# Altium PCB PCB1 (Luggi-PCs in Konflikt stehende Kopie 2014-06-04).PcbDoc
Units mm, origin at the board's own origin, x right, y up, seen from the top; angles counter-clockwise.
Board outline 100 x 160 mm, 2 copper layers (Top Layer, Bottom Layer); 53 components, 59 nets, 306 pads, 40 vias.
Unrouted connection lines stored in the file: 1.
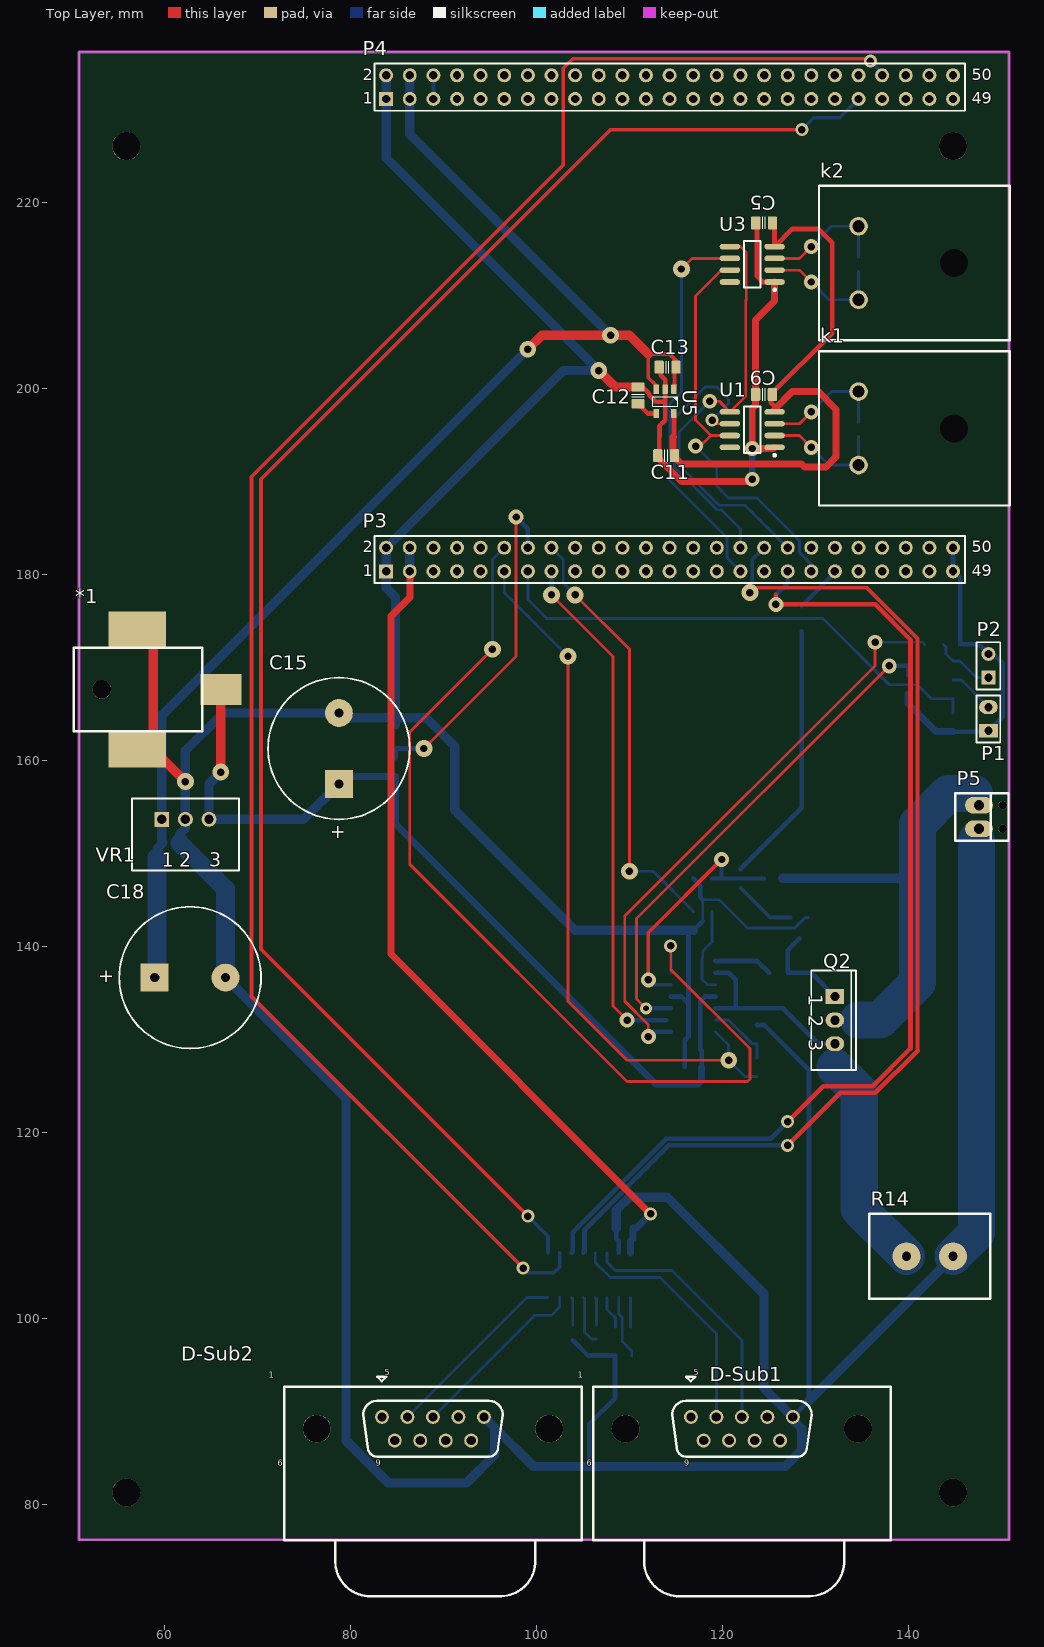
[diagram p0: Top Layer view]
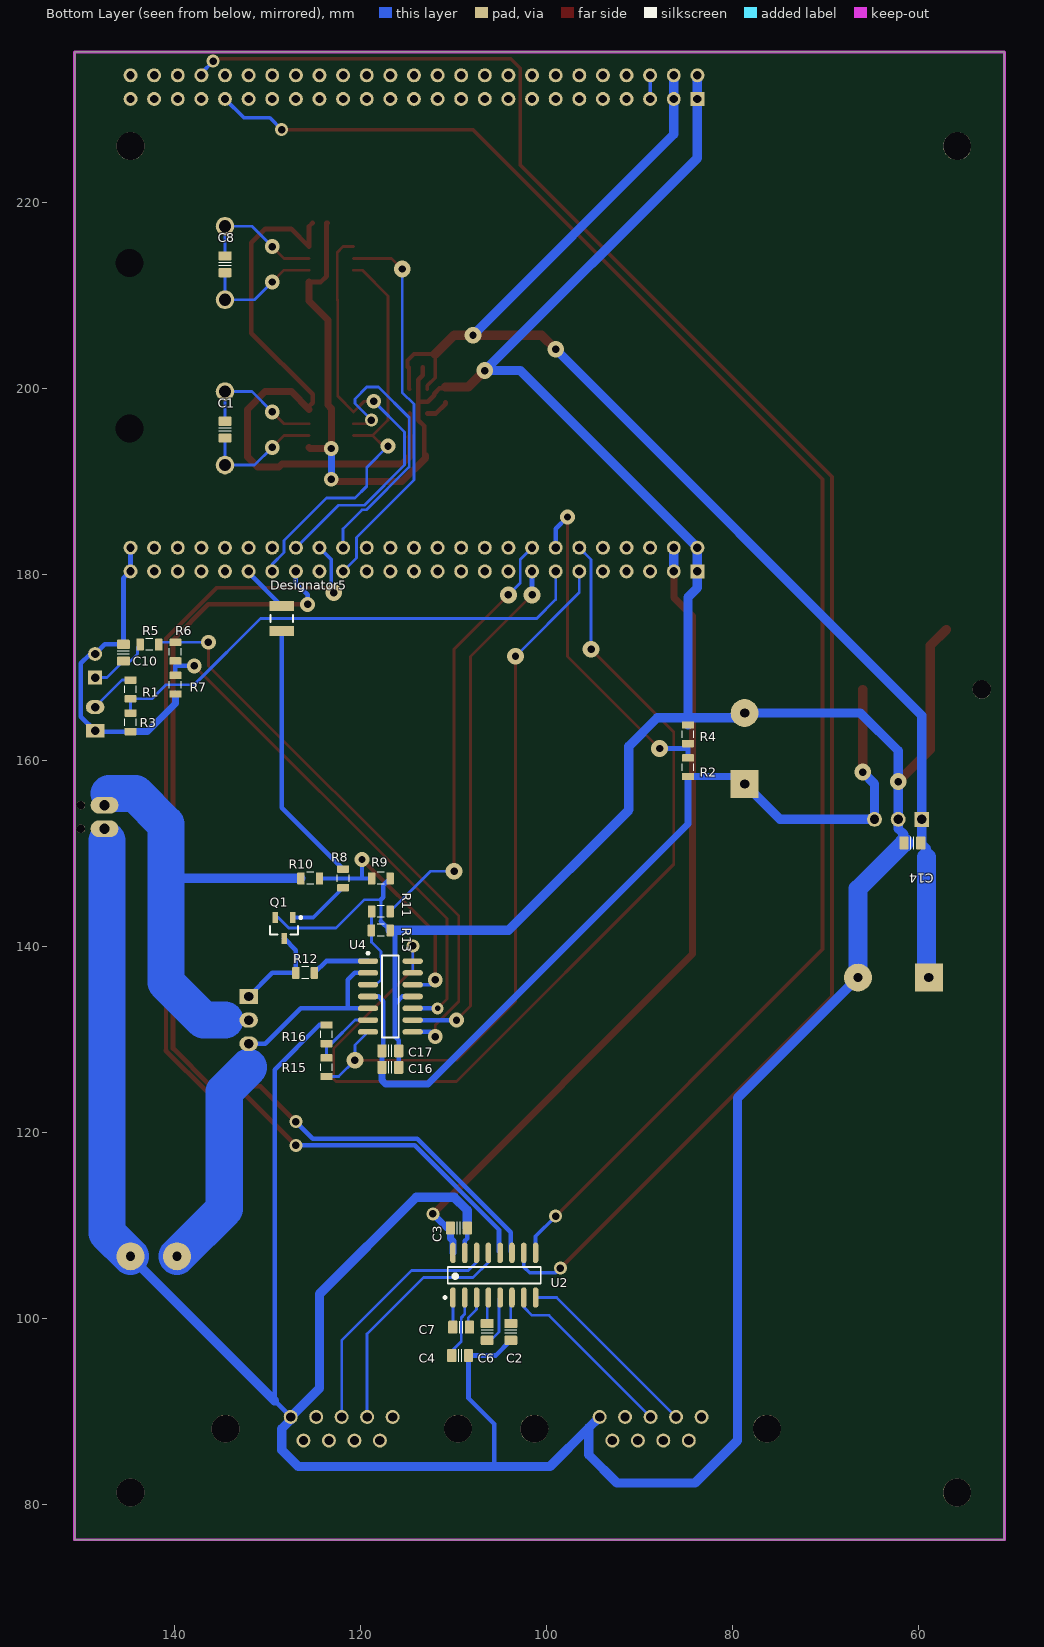
[diagram p1: Bottom Layer view, seen from below]
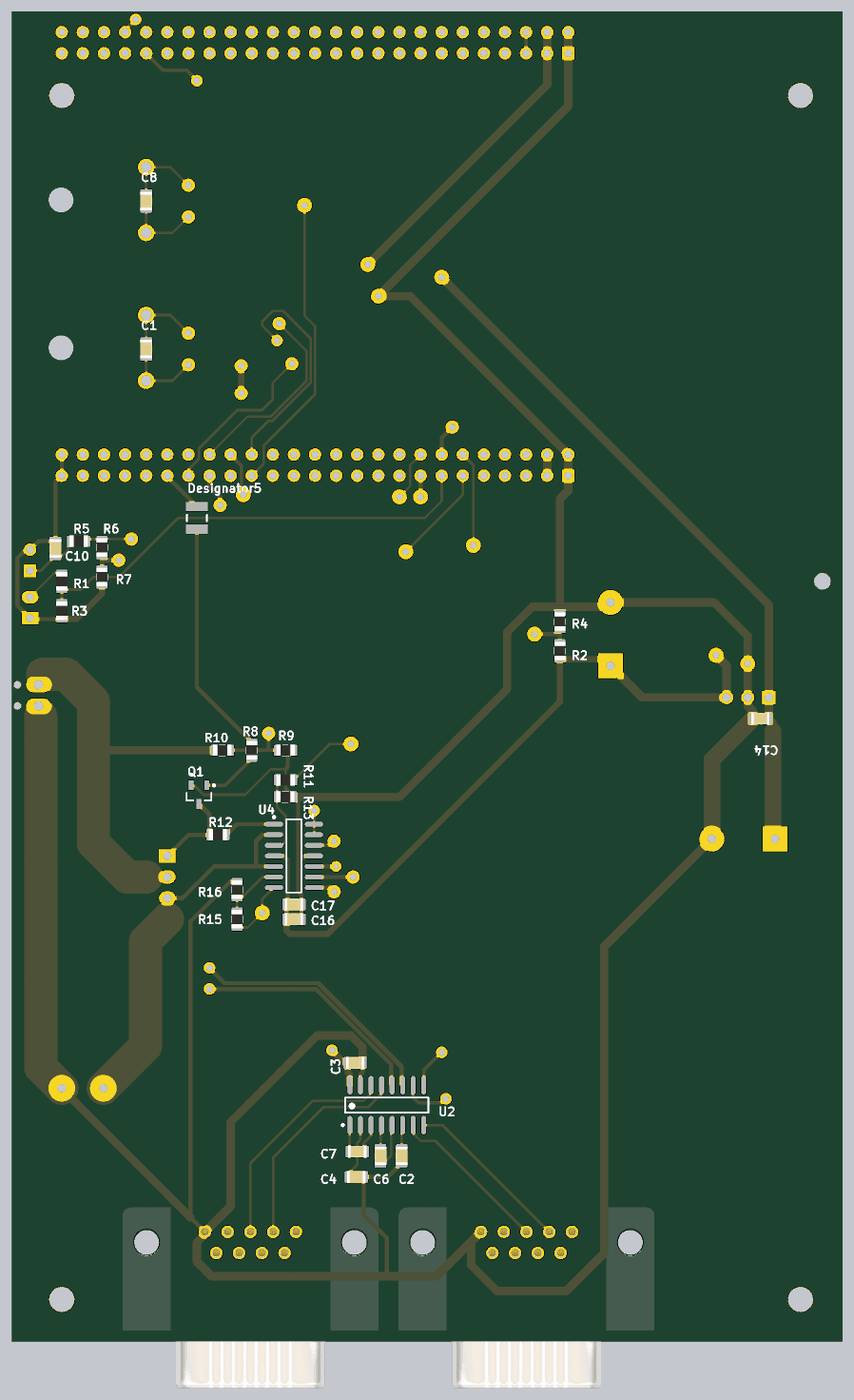
[diagram p2: 3D render of the assembled board from below, using the file's embedded part models]

## Layer stack, top to bottom
Top Layer: signal copper 0.0356
Dielectric: dielectric 0.32, FR-4, Dk 4.8
Bottom Layer: signal copper 0.0356

## Board outline
50.8,76.2 150.8,76.2 150.8,236.2 50.8,236.2

## Design rules (kind name [scope] priority, off if disabled: settings)
Clearance Clearance_1 [All] p1: gap=0.2
Clearance [All vs InPolygon] p2: gap=0.8
HoleSize [All] p1: absolutevalues=TRUE maxlimit=4 minlimit=0.4 maxpercent=80.000 minpercent=20.000
MinimumSolderMaskSliver [All] p1: minsoldermaskwidth=0
PolygonConnect [All] p1: connectstyle=Relief reliefconductorwidth=0.254 reliefentries=4 polygonreliefangle="90 Angle" airgapwidth=0.254
RoutingVias [All] p1: holewidth=0.8 width=1.6 viastyle="Through Hole" minholewidth=0.4 minwidth=1.27 maxholewidth=0.8 maxwidth=2
SilkToSilkClearance [All] p1: silktosilkclearance=0
SilkToSolderMaskClearance [IsPad] p1: minsilkscreentomaskgap=0 clearancetoexposedcopper=TRUE
SolderMaskExpansion [All] p1: expansion=0.102
Width [All] p1: maxlimit=5 minlimit=0.3 preferedwidth=0.3
24 further rules are at their usual default settings.

## Components (designator, comment, footprint, x,y, rotation, side; value= is the part's Value field where it differs from the comment)
*1 "DC-Jack" DC-Jack 66.04,167.64 r0 top
C1 "Cap" CAPC2012X135N 134.62,195.58 r90 bottom
C2 "Cap" CAPC2012X135N 103.886,98.552 r270 bottom
C3 "Cap" CAPC2012X135N 109.474,109.728 r0 bottom
C4 "Cap" CAPC2012X135N 109.336,96.012 r0 bottom
C5 "Cap" CAPC2012X135N 124.46,217.805 r0 top
C6 "Cap" CAPC2012X135N 106.426,98.552 r270 bottom
C7 "Cap" CAPC2012X135N 109.22,99.06 r180 bottom
C8 "Cap" CAPC2012X135N 134.62,213.36 r90 bottom
C9 "Cap" CAPC2012X135N 124.45,199.36 r0 top
C10 "Cap" CAPC2012X135N 145.542,171.588 r270 bottom
C11 "Cap" CAPC2012X135N 113.935,192.773 r0 top
C12 "Cap" CAPC2012X135N 110.9,199.26 r270 top
C13 "Cap" CAPC2012X135N 114.086,202.298 r0 top
C14 "Cap" CAPC2012X135N 60.706,151.13 r180 bottom
C15 "Cap Pol1" RB7.6-15 78.74,161.29 r270 top
C16 "Cap" CAPC2012X135N 116.84,127 r0 bottom
C17 "Cap" CAPC2012X135N 116.84,128.778 r0 bottom
C18 "Cap Pol1" RB7.6-15 62.738,136.652 r180 top
D-Sub1 "210112043" "WE-DS, 210112043" 122.074,88.138 r0 top
D-Sub2 "210112043" "WE-DS, 210112043" 88.854,88.138 r0 top
Designator5 "Comment" 14-1210 128.524,175.26 r270 bottom
k1 "Thermocouple Connector" "K-Type Thermocouple Connector" 134.62,191.77 r180 top
k2 "Thermocouple Connector" "K-Type Thermocouple Connector" 134.62,209.55 r180 top
P1 "Header 2" HDR1X2#1 148.59,163.195 r90 top
P2 "Header 2" HDR1X2#2 148.59,168.91 r90 top
P3 "Header 25X2" HDR2X25 83.82,180.34 r0 top
P4 "Header 25X2" HDR2X25 83.82,231.14 r0 top
P5 "Header 2" Connector6A 147.574,152.654 r90 top
Q1 "NPN" SOT-23_N 128.27,141.986 r270 bottom
Q2 "MOSFET-N" TO-220-AB 132.08,132.08 r270 top
R1 "Res2" RESC2012X70N 144.78,167.64 r90 bottom
R2 "Res2" RESC2012X70N 84.836,159.274 r270 bottom
R3 "Res2" RESC2012X70N 144.78,164.1 r90 bottom
R4 "Res2" RESC2012X70N 84.836,162.814 r270 bottom
R5 "Res2" RESC2012X70N 142.748,172.466 r0 bottom
R6 "Res2" RESC2012X70N 139.954,171.704 r90 bottom
R7 "Res2" RESC2012X70N 139.954,168.148 r90 bottom
R8 "Res2" RESC2012X70N 121.92,147.32 r90 bottom
R9 "Res2" RESC2012X70N 117.856,147.32 r180 bottom
R10 "Res2" RESC2012X70N 125.46,147.32 r180 bottom
R11 "Res2" RESC2012X70N 117.856,143.764 r180 bottom
R12 "Res2" RESC2012X70N 126,137.16 r0 bottom
R13 "Res2" RESC2012X70N 117.872,141.732 r0 bottom
R14 "Cer7W" Cer7W 144.78,106.68 r180 top
R15 "Res2" RESC2012X70N 123.698,127.016 r270 bottom
R16 "Res2" RESC2012X70N 123.698,130.556 r270 bottom
U1 "MAX31855KASA+T" MAXM-S8+4_N 123.19,195.58 r180 top
U2 "MAX3232CD" TI-D16_N 105.664,104.648 r90 bottom
U3 "MAX31855KASA+T" MAXM-S8+4_N 123.19,213.36 r180 top
U4 "TLC274BCDG4" TI-D14_N 116.84,134.62 r180 bottom
U5 "3.3V" SOT23-5 113.82,198.615 r270 top
VR1 "RECOM 7805" Recom78xx 62.23,153.67 r0 top

## Footprints (in the part's own frame and the unit in brackets; to place one, negate y for a bottom-side part, rotate by r counter-clockwise, add the part's x,y. Pads: shape width x height; smd on the part's side, far side on the other; paste and mask are expansions set on the pad)
14-1210 [mm] "Chip Resistor, Body 3.2x2.5mm, IPC High Density"
  rect 1.1x2.6 smd: 1(-1.35,0) 2(1.35,0)
  silkscreen extent -0.4,-1.2 0.4,1.2, body extent -1.68,-1.32 1.68,1.32, height 0.9
CAPC2012X135N [mm] "Chip Capacitor, Body 2.0x1.2mm, EIA 0805, IPC Medium Density"
  round 0.254 on Mech15: 0(0,0)
  rrect25% 1x1.4 smd: 1(-0.9,0) 2(0.9,0)
  Top Layer pour cut-out: -0.675,0.7 -0.475,0.9 0.475,0.9 0.675,0.7 0.675,-0.7 0.475,-0.9 -0.475,-0.9 -0.675,-0.7
  silkscreen extent -0.15,-0.65 0.15,0.65, body extent -1.1,-0.72 1.1,0.73, height 1.34
Cer7W [mm]
  round 3 hole 1: 1(0,0) 2(5,0)
  silkscreen extent -4,-4.57 9,4.57
Connector6A [mm]
  oval 1.8x3 hole 1.1: 1(0,0) 2(2.54,0)
  round 0.9 hole 0.9 paste+0 mask+0: 6(0,-2.54) 6(2.54,-2.54)
  silkscreen extent -1.27,-3.17 3.81,2.54
DC-Jack [mm]
  round 2 hole 2 paste+0 mask+0: 0(-12.8,0)
  rect 6.2x3.9 smd: 1(-9,-6.45) 1(-9,6.45)
  rect 4.4x3.3 smd: 2(0,0)
  silkscreen extent -15.8,-4.5 -2,4.5
HDR1X2#1 [mm] "Connector; Header; 2 Position"
  rect 1.5x2 hole 0.9: 1(0,0)
  oval 1.5x2 hole 0.9: 2(2.54,0)
  silkscreen extent -1.27,-1.27 3.81,1.27
HDR1X2#2 [mm] "Connector; Header; 2 Position"
  rect 1.5x1.5 hole 0.9: 1(0,0)
  round 1.5 hole 0.9: 2(2.54,0)
  silkscreen extent -1.27,-1.27 3.81,1.27
HDR2X25 [mm] "Connector; Header; 25x2 Position"
  rect 1.5x1.5 hole 0.9: 1(0,0)
  round 1.5 hole 0.9: 2(0,2.54) 3(2.54,0) 4(2.54,2.54) 5(5.08,0) 6(5.08,2.54) 7(7.62,0) 8(7.62,2.54) 9(10.16,0) 10(10.16,2.54) 11(12.7,0) 12(12.7,2.54) 13(15.24,0) 14(15.24,2.54) 15(17.78,0) 16(17.78,2.54) 17(20.32,0) 18(20.32,2.54) 19(22.86,0) 20(22.86,2.54) 21(25.4,0) 22(25.4,2.54) 23(27.94,0) 24(27.94,2.54) 25(30.48,0) 26(30.48,2.54) 27(33.02,0) 28(33.02,2.54) 29(35.56,0) 30(35.56,2.54) 31(38.1,0) 32(38.1,2.54) 33(40.64,0) 34(40.64,2.54) 35(43.18,0) 36(43.18,2.54) 37(45.72,0) 38(45.72,2.54) 39(48.26,0) 40(48.26,2.54) 41(50.8,0) 42(50.8,2.54) 43(53.34,0) 44(53.34,2.54) 45(55.88,0) 46(55.88,2.54) 47(58.42,0) 48(58.42,2.54) 49(60.96,0) 50(60.96,2.54)
  silkscreen extent -1.27,-1.27 62.23,3.81
"K-Type Thermocouple Connector" [mm]
  round 2 hole 1.3: 1(0,-7.9) 2(0,0)
  round 0 hole 3 unplated: 3(-10.25,-3.95)
  silkscreen extent -16.25,-12.25 4.25,4.35
MAXM-S8+4_N [mm] "SOIC, 8-Leads, Body 4.9x3.9mm, Pitch 1.27mm, IPC Medium Density"
  oval 2.2x0.6 smd: 1(-2.4,1.905) 2(-2.4,0.635) 3(-2.4,-0.635) 4(-2.4,-1.905) 5(2.4,-1.905) 6(2.4,-0.635) 7(2.4,0.635) 8(2.4,1.905)
  silkscreen extent -2.53,-2.5 0.9,2.88, body extent -2,-2.5 2,2.5, height 1.75
RB7.6-15 [mm] "Polarized Capacitor (Radial); 2 Leads"
  rect 3x3 hole 1: 1(3.81,0)
  round 3 hole 1: 2(-3.81,0)
  silkscreen extent -7.62,-7.62 7.62,7.62
Recom78xx [mm]
  rect 1.6x1.6 hole 1: 1(-2.54,0)
  round 1.6 hole 1: 2(0,0) 3(2.54,0)
  silkscreen extent -5.75,-5.5 5.75,2.25
RESC2012X70N [mm] "Chip Resistor, Body 2.0x1.2mm, EIA 0805, IPC Medium Density"
  round 0.254 on Mech15: 0(0,0)
  rrect25% 0.8x1.3 smd: 1(-1,0) 2(1,0)
  Top Layer pour cut-out: -0.725,0.65 -0.525,0.85 0.525,0.85 0.725,0.65 0.725,-0.65 0.525,-0.85 -0.525,-0.85 -0.725,-0.65
  silkscreen extent -0.38,-0.64 0.38,0.64, body extent -1.1,-0.67 1.1,0.68, height 0.69
SOT23-5 [mm]
  round 0.5 on Mech15: 0(0,0)
  rrect25% 1x0.6 smd: 1(-1.3,0.95) 2(-1.3,0) 3(-1.3,-0.95) 4(1.3,-0.95) 5(1.3,0.95)
  silkscreen extent -0.51,-1.35 0.51,1.35, body extent -1.4,-1.45 1.4,1.45, height 1.44
SOT-23_N [mm] "SOT23, 3-Leads, Body 2.9x1.3mm, Pitch 0.95mm, Lead Span 2.5mm, IPC Medium Density"
  rect 1.15x0.6 smd: 1(-1.125,0.95) 2(-1.125,-0.95) 3(1.125,0)
  silkscreen extent -1.25,-1.5 0.7,1.92, body extent -0.7,-1.5 0.7,1.5, height 1.1
TI-D14_N [mm] "SOIC, 14-Leads, Body 8.65x3.90mm, Pitch 1.27mm, IPC Medium Density"
  oval 2.2x0.6 smd: 1(-2.4,3.81) 2(-2.4,2.54) 3(-2.4,1.27) 4(-2.4,0) 5(-2.4,-1.27) 6(-2.4,-2.54) 7(-2.4,-3.81) 8(2.4,-3.81) 9(2.4,-2.54) 10(2.4,-1.27) 11(2.4,0) 12(2.4,1.27) 13(2.4,2.54) 14(2.4,3.81)
  silkscreen extent -2.53,-4.4 0.9,4.78, body extent -2,-4.38 2,4.38, height 1.75
TI-D16_N [mm] "SOIC, 16-Leads, Body 9.9x3.9mm, Pitch 1.27mm, IPC Medium Density"
  oval 2.2x0.6 smd: 1(-2.4,4.445) 2(-2.4,3.175) 3(-2.4,1.905) 4(-2.4,0.635) 5(-2.4,-0.635) 6(-2.4,-1.905) 7(-2.4,-3.175) 8(-2.4,-4.445) 9(2.4,-4.445) 10(2.4,-3.175) 11(2.4,-1.905) 12(2.4,-0.635) 13(2.4,0.635) 14(2.4,1.905) 15(2.4,3.175) 16(2.4,4.445)
  silkscreen extent -2.52,-5 0.9,5.42, body extent -1.99,-5 1.99,5, height 1.75
TO-220-AB [mm] "TO, Thru-Hole, Vertical, Heatsink Mounted; 3 In-Line Leads; Pitch 2.54 mm"
  rect 1.6x2 hole 1: 1(-2.54,0)
  oval 1.6x2 hole 1: 2(0,0) 3(2.54,0)
  silkscreen extent -5.35,-2.55 5.35,2.25
"WE-DS, 210112043" [mm] "D-SUB- 9P, MALE, RT ANGLE, TH"
  round 1.5 hole 1 unplated: 1(-5.48,1.27) 2(-2.74,1.27) 3(0,1.27) 4(2.74,1.27) 5(5.48,1.27) 6(-4.11,-1.27) 7(-1.37,-1.27) 8(1.37,-1.27) 9(4.11,-1.27)
  round 3 hole 3 unplated: 10(-12.5,0) 11(12.5,0)
  silkscreen extent -16,-18.01 16,5.6, body extent -15.4,-17.5 15.4,4.2, height 13.2

## Part data
C1 C2 C3 C4 C5 C6 C7 C8 C9 C10 C11 C12 C13 C14 C16 C17: "Capacitor"
C15 C18: "Polarized Capacitor (Radial)"
D-Sub1 D-Sub2: library part "WE-DS, 210112043", "D-SUB-Filter Connectors WE-DS, Bent 90°,TH"
P1 P2 P5: "Header, 2-Pin"
P3 P4: "Header, 25-Pin, Dual row"
Q1: "NPN Bipolar Transistor"
Q2: "N-Channel MOSFET"
R1 R2 R3 R4 R5 R6 R7 R8 R9 R10 R11 R12 R13 R15 R16: "Resistor"
R14: library part Res2, "Resistor"
U1 U3: "Cold Junction Compensated Thermocouple to Digital Converter, 14 Bits Temperature Resolution, -40 to 125 degC, 8-Pin SOIC (S8+4), Pb-Free, Tape ang Reel"
U2: "3-V to 5.5-V Multichannel RS-232 Line Driver / Receiver with ±15-kV ESD Protection, 0 to 70 degC, 16-Pin SOIC (D), Green (RoHS & no Sb/Br)"
U4: "LinCMOS(TM) Precision Quad Operational Amplifier, 3 to 16 V, 0 to 70 degC, 14-pin SOIC (D14), Green (RoHS & no Sb/Br)"
U5: library part LinREG_3V3_400mA_TPS73633DBV, "IC LDO Regulator 3.3V 400mA SOT23-5 SMD"
VR1: library part "Volt Reg", "Voltage Regulator"

## Free pads (board coordinates)
  round 3 hole 3: 0(55.88,81.28) 0(55.88,226.06) 0(144.78,81.28) 0(144.78,226.06)

## Via types
v1: diameter 1.6, hole 0.8, Top Layer to Bottom Layer, 16 vias
v2: diameter 1.8, hole 0.8, Top Layer to Bottom Layer, 14 vias
v3: diameter 1.4, hole 0.8, Top Layer to Bottom Layer, 9 vias
v4: diameter 1.3, hole 0.6, Top Layer to Bottom Layer, 1 vias

## Nets (pads, with @x,y where several pads share a name; then routed paths per layer and width w, separated by ;. In a path a pad name is that pad's centre, name@x,y a point inside that pad or via, vN(x,y) a via of type N, cw(c..) or ccw(c..) an arc to the next point about the centre after c; other vN are vias at no path point)
3V: P4.5 P4.6 | length 2.5
  Bottom Layer w0.4: P4.5 P4.6
5V: C13.2 C14.2 C18.1 P4.3 P4.4 U5.1 U5.3 VR1.1 | length 145.1
  Top Layer w0.4: 112.014,203.2 112.014,201.168 112.87,200.312 U5.3 ; 112.522,203.708 114.3,203.708 114.986,203.022 C13.2 ; U5.1 114.836,199.981 C13.2@114.836,202.298
  Top Layer w1: v2(99.06,204.216) 100.584,205.74 v2(107.95,205.74) 109.982,205.74 112.014,203.708
  Bottom Layer w1: 59.182,149.606 59.182,150.506 C14.2 59.69,151.246 VR1.1 59.69,164.846 v2(99.06,204.216) ; P4.4 P4.3 86.36,227.33 v2(107.95,205.74)
  Bottom Layer w2: C18.1 59.182,136.906 59.182,149.606
BOOT0: P4.21
CS0: P3.31 U3.6 | length 41.9
  Top Layer w0.3: v2(115.57,212.852) 116.713,213.995 U3.6
  Bottom Layer w0.3: v2(115.57,212.852) 115.57,199.581 114.308,198.319 114.308,190.152 120.48,183.98 120.48,181.78 P3.31
CS1: P3.32 U1.6 | length 30
  Top Layer w0.3: v3(118.872,196.596) 119.253,196.215 U1.6
  Bottom Layer w0.3: v3(118.872,196.596) 120.65,198.374 120.65,198.882 119.38,200.152 118.11,200.152 114.808,196.85 114.808,196.46 114.816,196.452 114.816,191.563 119.427,186.952 119.88,186.952 121.92,184.912 P3.32
DAC1: P3.16 R11.2 | length 46.9
  Top Layer w0.3: v2(104.14,177.8) 109.982,171.958 v2(109.982,148.082)
  Bottom Layer w0.3: P3.16 102.87,181.61 102.87,179.07 v2(104.14,177.8) ; v2(109.982,148.082) 112.538,148.082 R11.2
DAC2: P3.15 U4.9 | length 55.8
  Top Layer w0.3: v2(101.6,177.8) 108.204,171.196 108.204,133.604 v1(109.728,132.08)
  Bottom Layer w0.5: v2(101.6,177.8) P3.15 ; v1(109.728,132.08) U4.9@113.932,132.08
GFET: Q1.3 Q2.1 R12.2 | length 10.4
  Bottom Layer w0.5: Q1.3 127,139.591 R12.2 129.54,137.16 Q2.1
GND: *1.1 C2.2 C3.1 C4.1 C5.1 C9.1 C10.1 C11.1 C12.1 C13.1 C14.1 C15.2 C16.1 C17.1 C18.2 D-Sub1.5 D-Sub2.5 P1.1 P2.2 P3.1 P3.2 P3.5 P3.49 P3.50 P4.1 P4.2 P4.49 P4.50 P5.1 Q1.2 R3.1 R4.1 R7.1 R9.2 R13.1 R14.1 R16.1 U1.1 U2.15 U3.1 U4.11 U5.2 VR1.2 | length 630.5
  Top Layer w0.5: C12.1@110.9,200.01 111.55,200.01 112.12,199.44 112.12,199.273 112.833,198.56 113.82,198.56 ; C11.1@113.185,192.773 113.185,194.781 ; 113.209,194.805 113.209,195.969 113.82,196.58 113.82,198.56 ; C13.1@113.336,202.298 113.336,201.424 113.82,200.94 U5.2 113.82,198.56 ; C5.1@123.57,217.795 C5.1@123.7,217.795 ; C5.1@123.71,217.805 C5.1@123.7,217.795 ; U3.1 124.333,211.455 123.7,212.088 C5.1@123.7,217.795
  Top Layer w0.75: C11.1 113.035,192.527 115.57,189.992 v1@123.19,189.992 ; U1.1 125.463,193.548 v1(123.19,193.548) 123.19,197.866 123.55,198.226 C9.1 123.55,207.37 125.59,209.41 U3.1
  Top Layer w1: *1.1@57.04,174.09 58.774,172.356 58.774,161.19 v2(62.23,157.734) ; v2(106.68,201.93) 108.45,200.16 C12.1
  Bottom Layer w0.3: 117.856,142.716 117.856,145.034 119.634,145.034 122.682,141.986 127.762,141.986 128.887,143.111 Q1.2
  Bottom Layer w0.5: C2.2 105.526,96.012 C4.1 108.436,91.418 105.664,88.646 105.664,84.074 ; C3.1 108.574,108.596 108.839,108.331 U2.15 ; U4.11 115.57,134.62 116.332,133.858 ; C16.1 C17.1 115.94,129.91 116.332,130.302 116.332,133.858 ; 116.332,141.192 116.332,133.858 ; R9.2 117.602,146.574 117.602,145.288 117.856,145.034 ; R13.1 117.856,142.716 ; R16.1 124.476,131.556 129.286,126.746 129.286,91.14 D-Sub1.5 ; R3.1 148.495,163.1 P1.1 150.114,164.719 150.114,170.434 149.098,171.45 P2.2 147.552,172.488 C10.1 145.542,179.578 P3.49 P3.50
  Bottom Layer w0.75: v1@123.19,189.992 v1(123.19,193.548) ; R7.1 139.954,166.116 142.97,163.1 R3.1
  Bottom Layer w1: C14.1 61.606,152.03 62.23,152.654 VR1.2 v2(62.23,157.734) 62.23,161.036 66.294,165.1 C15.2 79.248,164.592 84.836,164.592 ; C18.2 79.502,123.698 79.502,86.868 84.074,82.296 92.456,82.296 95.504,85.344 95.504,88.238 ; P4.2 P4.1 83.82,224.79 v2(106.68,201.93) 102.87,201.93 P3.2 P3.1 83.82,178.562 84.836,177.546 84.836,164.592 ; R4.1 84.836,164.592 ; D-Sub2.5 95.504,88.238 ; C3.1 108.574,111.622 109.982,113.03 114.046,113.03 124.46,102.616 124.46,92.502 D-Sub1.5 127.554,89.108 128.524,88.138 128.524,85.852 126.746,84.074 105.664,84.074 99.668,84.074 95.504,88.238 ; R13.1 104.14,141.732 91.186,154.686 91.186,161.544 88.138,164.592 84.836,164.592 ; 129.286,91.14 144.78,106.634 R14.1
  Bottom Layer w2: C14.1 66.548,146.188 C18.2
  Bottom Layer w4: R14.1 147.32,109.22 147.32,151.384
  other v1: 123.19,190.246
MISO: P3.37 U1.7 U3.7 | length 45.1
  Top Layer w0.3: v1(117.094,193.802) 117.602,193.802 118.745,194.945 ; U1.7 118.745,194.945 ; U3.7 119.865,212.725 117.094,209.954 117.094,196.596 118.745,194.945
  Bottom Layer w0.3: v1(117.094,193.802) 119.38,191.516 119.38,189.484 120.65,188.214 123.698,188.214 128.27,183.642 128.27,182.372 129.54,181.102 P3.37
MOSI: P3.38
NetC1_1: C1.1 k1.2 U1.2 | length 13.4
  Top Layer w0.3: U1.2 128.27,194.945 v1(129.54,193.675)
  Bottom Layer w0.3: v1(129.54,193.675) 131.445,191.77 k1.2 C1.1@134.62,194.83
NetC1_2: C1.2 k1.1 U1.3 | length 13.8
  Top Layer w0.3: U1.3 128.27,196.215 v1(129.54,197.485)
  Bottom Layer w0.3: v1(129.54,197.485) 131.725,199.67 k1.1 C1.2@134.62,196.33
NetC2_1: C2.1 U2.6 | length 3
  Bottom Layer w0.3: U2.6 103.886,102.121 C2.1@103.886,99.302
NetC4_2: C4.2 U2.2 | length 6.8
  Bottom Layer w0.3: U2.2 108.839,100.457 109.22,100.076 109.22,97.503 110.236,96.487 C4.2
NetC6_1: C6.1 U2.4 | length 3
  Bottom Layer w0.3: U2.4 106.426,102.121 C6.1@106.426,99.302
NetC6_2: C6.2 U2.5 | length 5.3
  Bottom Layer w0.3: U2.5 105.156,102.121 105.156,98.552 105.906,97.802 C6.2@106.426,97.802
NetC7_1: C7.1 U2.1 | length 3.2
  Bottom Layer w0.3: U2.1 110.109,99.071 C7.1
NetC7_2: C7.2 U2.3 | length 3.6
  Bottom Layer w0.3: U2.3 107.569,100.965 108.47,100.064 C7.2@108.47,99.06
NetC8_1: C8.1 k2.2 U3.2 | length 13.4
  Top Layer w0.3: U3.2 128.27,212.725 v1(129.54,211.455)
  Bottom Layer w0.3: v1(129.54,211.455) 131.445,209.55 k2.2 C8.1@134.62,212.61
NetC8_2: C8.2 k2.1 U3.3 | length 13.8
  Top Layer w0.3: U3.3 128.27,213.995 v1(129.54,215.265)
  Bottom Layer w0.3: v1(129.54,215.265) 131.725,217.45 k2.1 C8.2@134.62,214.11
NetC10_2: C10.2 P2.1 R5.2 | length 6.8
  Bottom Layer w0.3: R5.2 144.018,172.196 144.018,171.45 144.78,170.688 C10.2 147.32,168.91 P2.1
NetC12_2: C12.2 U5.4 | length 2.6
  Top Layer w0.5: C12.2@110.9,198.51 C12.2 111.945,197.315 U5.4
NetP1_2: P1.2 R1.2 | length 5
  Bottom Layer w0.3: R1.2 145.685,168.64 P1.2
NetP5_2: P5.2 Q2.2 R10.1 | length 47.1
  Bottom Layer w1: R10.1 140.716,147.32 ; 147.066,156.464 147.32,156.21
  Bottom Layer w4: 134.62,132.08 136.906,132.08 140.97,136.144 140.97,153.162 144.272,156.464 147.066,156.464
NetQ1_2: Q1.1 R8.1 | length 6.7
  Bottom Layer w0.4: R8.1 125.129,143.111 Q1.1
NetQ2_3: Q2.3 R14.2 U4.2 U4.5 | length 46
  Bottom Layer w0.5: U4.5 126.492,133.35 130.302,129.54 Q2.3 ; U4.2 120.65,137.16 121.412,136.398 121.412,133.35
  Bottom Layer w1: 132.08,127 Q2.3
  Bottom Layer w4: 132.08,127 134.7,124.38 134.7,111.76 R14.2
NetR5_1: R5.1 R6.2 U4.8 | length 62.7
  Top Layer w0.3: v1(112.014,130.302) 112.014,131.572 109.474,134.112 109.474,143.256 136.398,170.18 v1(136.398,172.72)
  Bottom Layer w0.3: v1(136.398,172.72) R6.2@139.938,172.72 ; R6.2 141.51,172.704 R5.1
  Bottom Layer w0.5: v1(112.014,130.302) 112.522,130.81 U4.8
NetR6_1: R6.1 R7.2 U4.10 | length 54.3
  Top Layer w0.3: v4(111.76,133.35) 110.744,134.366 110.744,143.002 v1(137.922,170.18)
  Bottom Layer w0.5: v4(111.76,133.35) U4.10 ; v1(137.922,170.18) 139.954,170.18 R7.2
NetR9_1: R9.1 R10.2 U4.12 | length 26.5
  Top Layer w0.4: v1(112.014,136.398) 112.014,141.478 v1(119.888,149.352)
  Bottom Layer w0.4: v1(112.014,136.398) 112.522,135.89 U4.12 ; R9.1 119.888,147.32 ; v1(119.888,149.352) 119.888,147.32 ; R10.2 119.888,147.32
NetR11_1: R11.1 R13.2 U4.3 | length 9.4
  Bottom Layer w0.3: R11.1 118.856,141.748 R13.2 118.872,140.462 117.856,139.446 117.856,138.831 117.79,138.765 117.79,136.464 118.364,135.89 U4.3
NetR12_1: R12.1 U4.1 | length 6.3
  Bottom Layer w0.5: U4.1 123.73,138.43 R12.1
NetR15_1: R15.1 R16.2 U4.6 | length 7
  Bottom Layer w0.3: U4.6 120.65,132.08 123.19,129.54 123.698,129.54 R15.1
PA0: P3.12 U4.13 U4.14 | length 105.4
  Top Layer w0.3: v2(95.25,171.958) 86.36,163.068 86.36,148.844 109.728,125.476 122.682,125.476 122.936,125.73 122.936,129.032 114.414,137.554 v3(114.414,140.068)
  Bottom Layer w0.3: v2(95.25,171.958) 95.25,181.61 P3.12 ; v3(114.414,140.068) 114.44,140.068 U4.14 U4.13
PA1: P3.11 R15.2 U4.7 | length 76.4
  Top Layer w0.3: v2(103.378,171.196) 103.378,134.112 109.728,127.762 v2(120.65,127.762)
  Bottom Layer w0.3: P3.11 96.52,178.054 v2(103.378,171.196) ; U4.7 120.65,129.4 v2(120.65,127.762) 122.396,126.016 R15.2
PA2: P3.14 R2.1 R4.2 | length 36.9
  Top Layer w0.3: v2(87.884,161.29) 97.79,171.196 v1(97.79,186.182)
  Bottom Layer w0.5: R2.1 84.836,161.29 v2(87.884,161.29) ; v1(97.79,186.182) 99.06,184.912 P3.14
PA3: P3.13 R1.1 R3.2 | length 54.7
  Bottom Layer w0.3: P3.13 99.06,177.292 101.092,175.26 130.81,175.26 137.922,168.148 140.97,168.148 142.478,166.64 R1.1 R3.2
PA6: P3.18
PA7: P3.17
PA8: P4.43
PA13: P4.42
PA15: P4.40
PB15: Designator5.1 Designator5.2 P3.39 R8.2 | length 33.5
  Bottom Layer w0.5: R8.2 128.524,154.924 Designator5.2 ; Designator5.1 132.08,180.166 P3.39
PC2: P3.10
PC3: P3.9
PD8: P3.40
PE15: P3.33
RXD1: D-Sub1.2 U2.13 | length 26.2
  Bottom Layer w0.3: U2.13 106.299,106.045 107.95,104.394 113.284,104.394 119.334,98.344 D-Sub1.2
RXD2: D-Sub2.2 U2.8 | length 20.4
  Bottom Layer w0.3: D-Sub2.2 98.954,102.248 U2.8
SCK: P3.36 U1.5 U3.5 | length 46.1
  Top Layer w0.3: v1(118.618,198.628) 119.647,198.628 U1.5 122.5,199.195 122.5,209.495 122.555,209.55 122.555,214.63 121.92,215.265 U3.5
  Bottom Layer w0.3: v1(118.618,198.628) 115.316,195.326 115.316,191.77 119.634,187.452 122.428,187.452 P3.36
TXD1: D-Sub1.3 U2.14 | length 27.2
  Bottom Layer w0.3: U2.14 107.569,106.045 108.458,105.156 114.554,105.156 122.074,97.636 D-Sub1.3
TXD2: D-Sub2.3 U2.7 | length 19.6
  Bottom Layer w0.3: D-Sub2.3 99.776,100.33 101.6,100.33 102.489,101.219 U2.7
U1RX: P4.41 U2.9 | length 177.2
  Top Layer w0.4: v3(99.06,110.998) 70.358,139.7 70.358,190.246 107.95,227.838 v3(128.524,227.838)
  Bottom Layer w0.4: v3(99.06,110.998) 101.219,108.839 U2.9 ; v3(128.524,227.838) 129.794,229.108 132.588,229.108 P4.41
U1TX: P4.44 U2.10 | length 196.3
  Top Layer w0.4: v3(98.552,105.41) 69.342,134.62 69.342,190.5 102.87,224.028 102.87,234.442 103.886,235.458 135.636,235.458 v3(135.89,235.204)
  Bottom Layer w0.4: v3(98.552,105.41) 99.06,104.902 101.854,104.902 102.489,105.537 U2.10 ; v3(135.89,235.204) P4.44@137.16,233.934
U3RX: P3.35 U2.11 | length 111.9
  Top Layer w0.5: 125.73,177.8 v1(125.73,176.784) 136.398,176.784 140.208,172.974 140.208,129.032 136.144,124.968 130.81,124.968 v3(127,121.158)
  Bottom Layer w0.5: U2.11 103.886,107.175 103.886,109.267 113.937,119.318 125.16,119.318 v3(127,121.158) ; v1(125.73,176.784) 125.73,177.8 127,179.07 P3.35
U3TX: P3.34 U2.12 | length 116.6
  Top Layer w0.4: v2(122.936,178.054) 123.444,178.562 135.539,178.562 140.97,173.131 140.97,128.804
  Top Layer w0.5: v3(127,118.618) 132.65,124.268 136.434,124.268 140.97,128.804
  Bottom Layer w0.4: v2(122.936,178.054) 123.19,178.308 123.19,181.61 P3.34
  Bottom Layer w0.5: U2.12 105.156,107.175 105.156,109.547 114.227,118.618 v3(127,118.618)
VCC: C5.2 C9.2 C11.2 U1.4 U3.4 U5.5 | length 67.4
  Top Layer w0.5: 114.77,194.866 U5.5 ; C5.2@125.21,217.805 125.59,217.425 U3.4 127.485,217.16 130.3,217.16 131.8,215.66 131.8,205.96 125.2,199.36 125.2,198.46 125.59,198.07 U1.4@125.59,197.76
  Top Layer w0.75: 114.709,194.805 114.685,194.781 114.685,192.773 115.598,191.86 128.5,191.86 128.8,191.56 131.1,191.56 132.2,192.66 132.2,197.76 130.3,199.66 127.49,199.66 U1.4@125.59,197.76
VDD: C3.2 P3.3 P3.4 P4.22 U2.16 | length 89.4
  Top Layer w0.75: P3.3 86.36,177.546 84.328,175.514 84.328,139.192 v3(112.268,111.252)
  Bottom Layer w0.75: U2.16 110.109,108.331 110.374,108.596 C3.2 110.744,109.728 v3(112.268,111.252)
  Bottom Layer w1: P3.3 P3.4
VIN: *1.2 C15.1 C16.2 C17.2 R2.2 U4.4 VR1.3 | length 96.6
  Top Layer w1: v2(66.04,158.75) *1.2
  Bottom Layer w0.5: C16.2 C17.2 117.602,128.916 117.602,134.112 118.11,134.62 U4.4
  Bottom Layer w0.75: C15.1 79.534,158.274 R2.2 84.836,153.162 112.776,125.222 117.348,125.222 117.74,125.614 C16.2
  Bottom Layer w1: v2(66.04,158.75) 64.77,157.48 VR1.3 74.93,153.67 C15.1
pads on no net: *1.0 C1.0 C2.0 C3.0 C4.0 C5.0 C6.0 C7.0 C8.0 C9.0 C10.0 C11.0 C12.0 C13.0 C14.0 C16.0 C17.0 D-Sub1.1 D-Sub1.4 D-Sub1.6 D-Sub1.7 D-Sub1.8 D-Sub1.9 D-Sub1.10 D-Sub1.11 D-Sub2.1 D-Sub2.4 D-Sub2.6 D-Sub2.7 D-Sub2.8 D-Sub2.9 D-Sub2.10 D-Sub2.11 k1.3 k2.3 P3.6 P3.7 P3.8 P3.19 P3.20 P3.21 P3.22 P3.23 P3.24 P3.25 P3.26 P3.27 P3.28 P3.29 P3.30 P3.41 P3.42 P3.43 P3.44 P3.45 P3.46 P3.47 P3.48 P4.7 P4.8 P4.9 P4.10 P4.11 P4.12 P4.13 P4.14 P4.15 P4.16 P4.17 P4.18 P4.19 P4.20 P4.23 P4.24 P4.25 P4.26 P4.27 P4.28 P4.29 P4.30 P4.31 P4.32 P4.33 P4.34 P4.35 P4.36 P4.37 P4.38 P4.39 P4.45 P4.46 P4.47 P4.48 P5.6 R1.0 R2.0 R3.0 R4.0 R5.0 R6.0 R7.0 R8.0 R9.0 R10.0 R11.0 R12.0 R13.0 R15.0 R16.0 U1.8 U3.8 U5.0

## Keep-outs
Keep-Out Layer:
  the board outline again, w0.3

## Silkscreen, mask and mechanical layers (free items; w line width, h text height)
Drill Drawing:
  text ".LEGEND" at 143.842,87.781 h1.52
  text "Drill Drawing." at 155.018,84.733 h1.52

## Dimensions
50.8,76.2 to 150.8,76.2 on Mechanical 1
50.8,76.2 to 50.8,236.2 on Mechanical 1

## Text inside footprints (layer, text, board x,y; h text height)
C15: Top Overlay "+" at 78.003,153.158 h1.5 r270
C18: Top Overlay "+" at 54.606,137.389 h1.5 r180
D-Sub1: Top Overlay "1" at 104.398,93.646 h0.64; Top Overlay "5" at 116.898,93.896 h0.64; Top Overlay "9" at 115.898,84.146 h0.64; Top Overlay "6" at 105.398,84.146 h0.64
D-Sub2: Top Overlay "1" at 71.178,93.646 h0.64; Top Overlay "5" at 83.678,93.896 h0.64; Top Overlay "9" at 82.678,84.146 h0.64; Top Overlay "6" at 72.178,84.146 h0.64
P3: Top Overlay "50" at 146.812,182.372 h1.27; Top Overlay "49" at 146.812,179.832 h1.27; Top Overlay "1" at 81.28,179.832 h1.27; Top Overlay "2" at 81.28,182.372 h1.27
P4: Top Overlay "50" at 146.812,233.172 h1.27; Top Overlay "49" at 146.812,230.632 h1.27; Top Overlay "1" at 81.28,230.632 h1.27; Top Overlay "2" at 81.28,233.172 h1.27
Q2: Top Overlay "3" at 129.286,130.048 h1.5 r270; Top Overlay "2" at 129.286,132.588 h1.5 r270; Top Overlay "1" at 129.286,134.874 h1.5 r270
VR1: Top Overlay "1" at 59.69,148.59 h1.5; Top Overlay "2" at 61.595,148.59 h1.5; Top Overlay "3" at 64.77,148.59 h1.5